# EAGLE board OpenPixelNode (EAGLE 6.5.0)
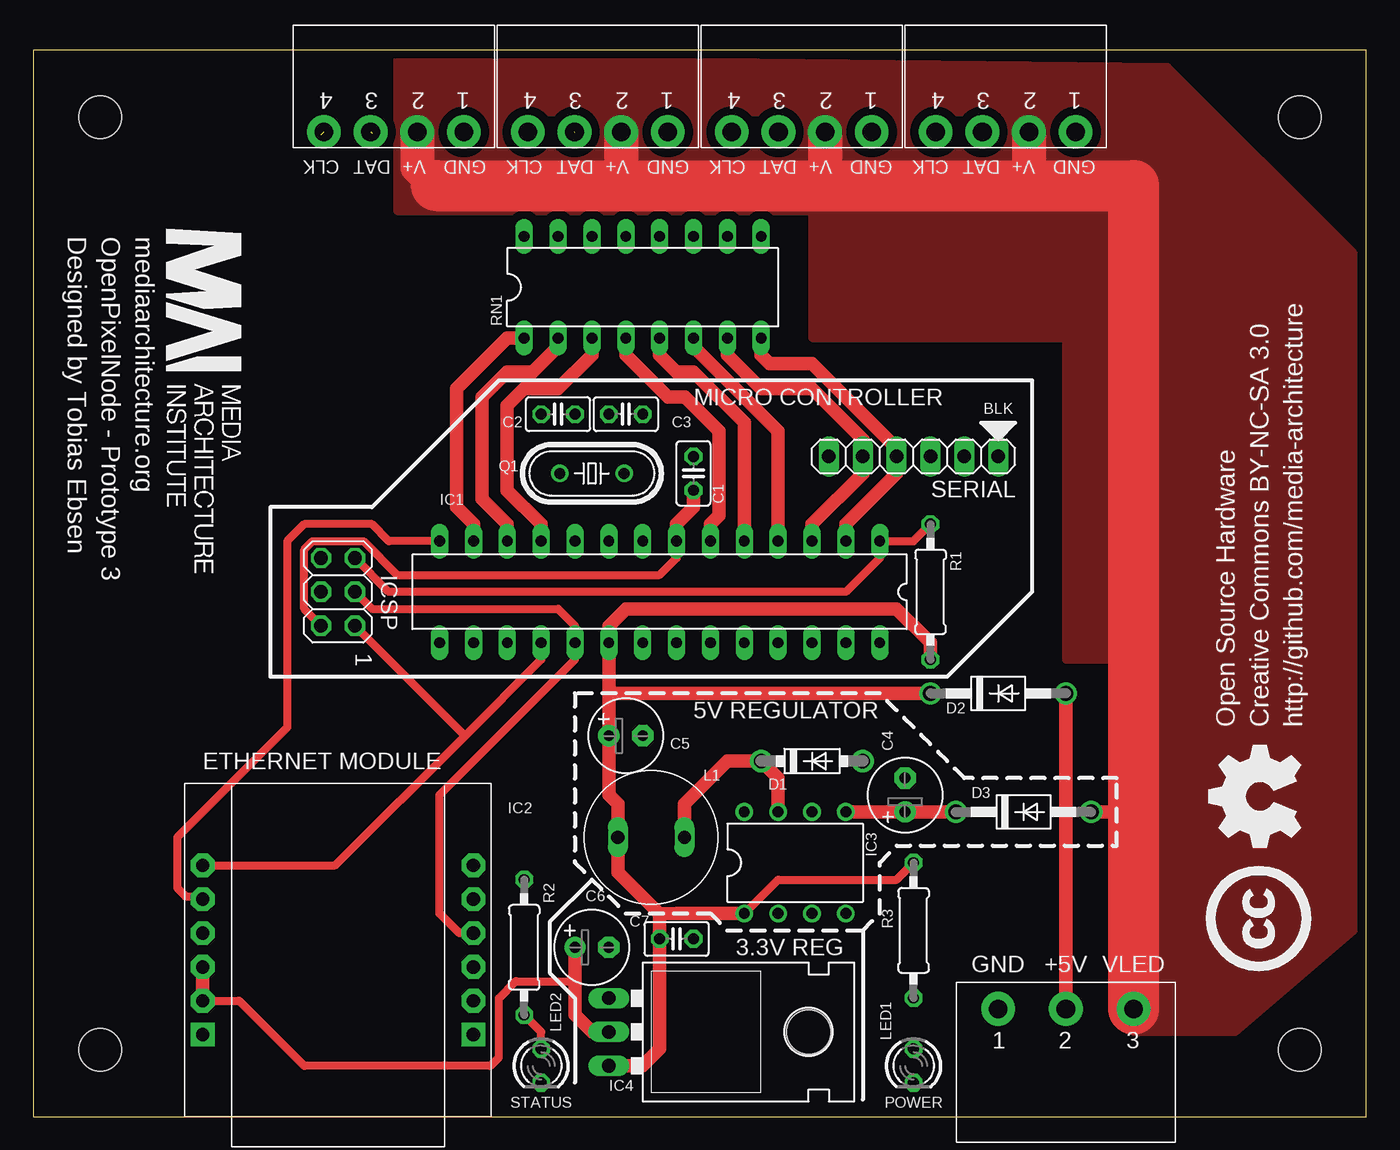
[diagram p0: board, top side]
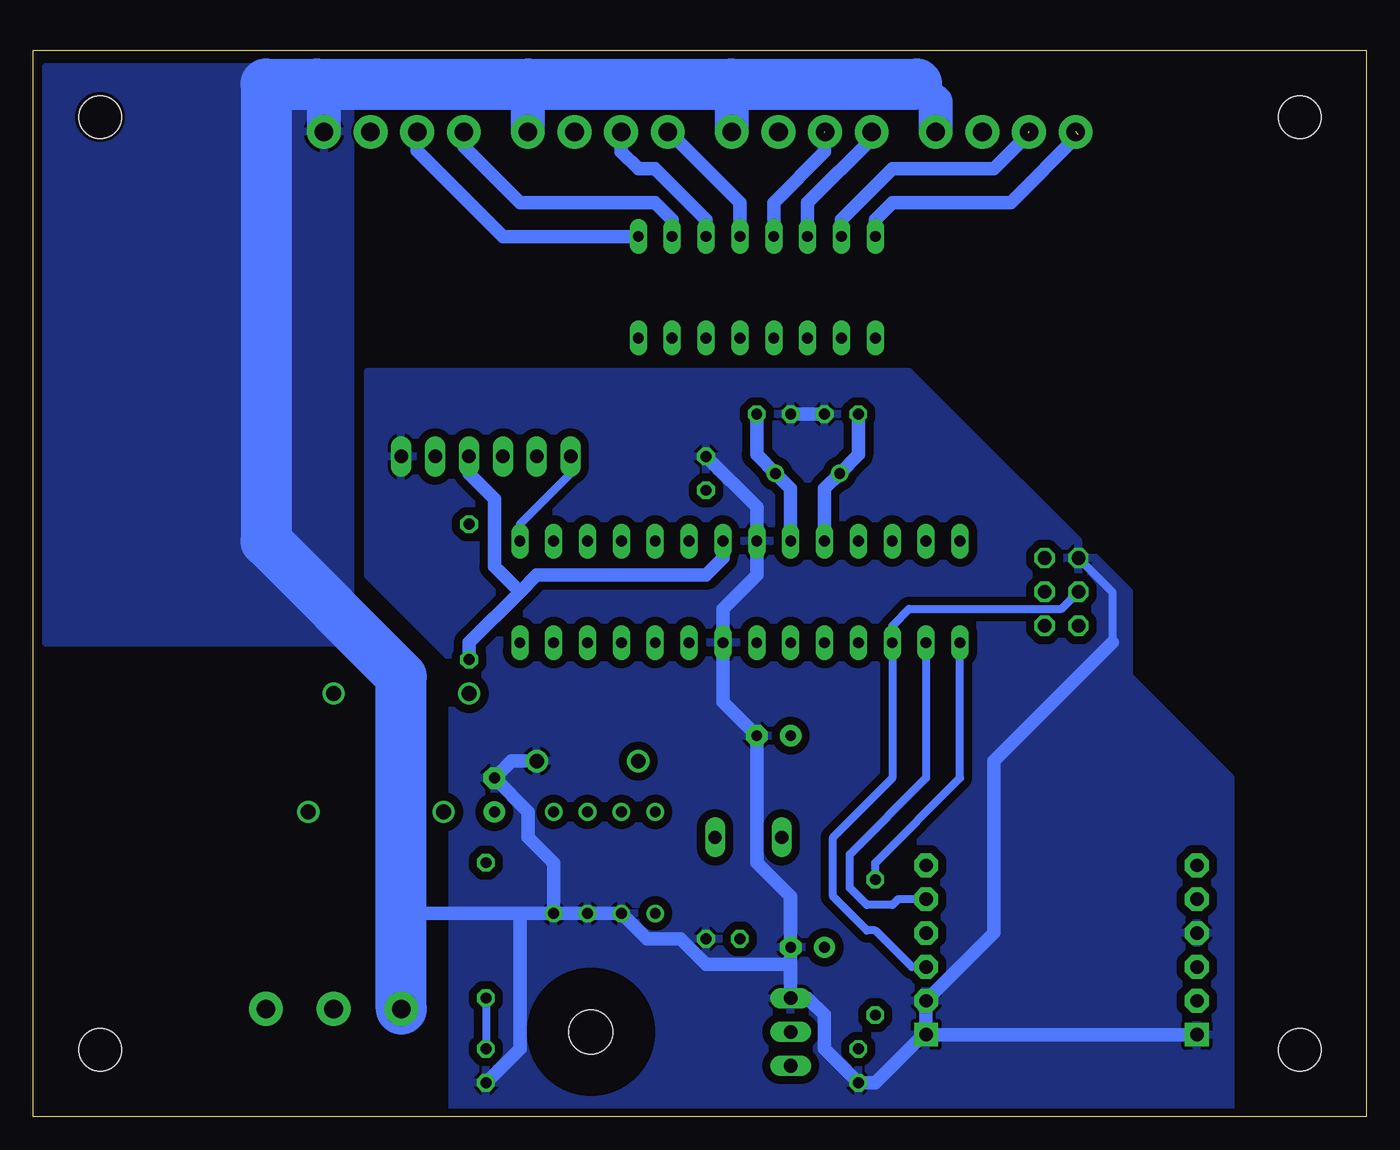
[diagram p1: board, bottom side, seen from below]

Size 100 x 80 mm. Coordinates in mm from the lower left corner, seen from the top.
Outline: 0,0 100,0 100,80 0,80 0,0
Copper layers (1*16): Top 0.035mm / dielectric 1.5mm / Bottom 0.035mm
Design rules "Elecrow_2-layer_eagle_rule": minimum track width 6mil, minimum drill 12mil, track to track 6mil, track to pad 6mil, pad to pad 6mil, via to via 6mil, smd to smd 0mil, copper to edge 10mil, drill to drill 10mil, minimum pad ring 10mil, minimum via ring 6mil, stop-mask expansion 2mil, vias tented up to drill 100mil, thermal gap 10mil
Holes 3.2 mm at 5,5 5,75 95,5 95,75

## Footprints (pad centres in the part's own frame; a part is rotated, then mirrored left to right if it is on the bottom)
C025-025X050 = drill 0.813 octagon: 1 -1.27,0; 2 1.27,0
E2,5-6 = drill 0.813 pad 1.6: + -1.27,0 | drill 0.813 pad 1.6 octagon: - 1.27,0
DO41-7.6 = drill 1.1 pad 1.7: A 3.81,0; C -3.81,0
DO41-10 = drill 1.118: A 5.08,0; C -5.08,0
DIL28-3 = drill 0.813 long: 1 -16.51,-3.81; 2 -13.97,-3.81; 3 -11.43,-3.81; 4 -8.89,-3.81; 5 -6.35,-3.81; 6 -3.81,-3.81; 7 -1.27,-3.81; 8 1.27,-3.81; 9 3.81,-3.81; 10 6.35,-3.81; 11 8.89,-3.81; 12 11.43,-3.81; 13 13.97,-3.81; 14 16.51,-3.81; 15 16.51,3.81; 16 13.97,3.81; 17 11.43,3.81; 18 8.89,3.81; 19 6.35,3.81; 20 3.81,3.81; 21 1.27,3.81; 22 -1.27,3.81; 23 -3.81,3.81; 24 -6.35,3.81; 25 -8.89,3.81; 26 -11.43,3.81; 27 -13.97,3.81; 28 -16.51,3.81
WIZ820IO = drill 1 pad 1.778 square: J1.1 -10.16,6.35; J2.1 10.16,6.35 | drill 1 pad 1.778 octagon: J1.2 -10.16,3.81; J1.3 -10.16,1.27; J1.4 -10.16,-1.27; J1.5 -10.16,-3.81; J1.6 -10.16,-6.35; J2.2 10.16,3.81; J2.3 10.16,1.27; J2.4 10.16,-1.27; J2.5 10.16,-3.81; J2.6 10.16,-6.35
DIL08 = drill 0.813 pad 1.27: 1 -3.81,-3.81; 2 -1.27,-3.81; 3 1.27,-3.81; 4 3.81,-3.81; 5 3.81,3.81; 6 1.27,3.81; 7 -1.27,3.81; 8 -3.81,3.81
TO220L1 = drill 1.016 long: 1 -2.54,-3.81; 2 0,-3.81; 3 2.54,-3.81 | hole 3.302: 0,11.176
2X03 = drill 1.016 octagon: 1 -2.54,-1.27; 2 -2.54,1.27; 3 0,-1.27; 4 0,1.27; 5 2.54,-1.27; 6 2.54,1.27
13R334C = drill 1 long: P$1 0,2.5; P$2 0,-2.5
LED3MM = drill 0.813 octagon: A -1.27,0; K 1.27,0
HC49/S = drill 0.813: 1 -2.413,0; 2 2.413,0
0207/10 = drill 0.813 octagon: 1 -5.08,0; 2 5.08,0
DIL16 = drill 0.813 long: 1 -8.89,-3.81; 2 -6.35,-3.81; 3 -3.81,-3.81; 4 -1.27,-3.81; 5 1.27,-3.81; 6 3.81,-3.81; 7 6.35,-3.81; 8 8.89,-3.81; 9 8.89,3.81; 10 6.35,3.81; 11 3.81,3.81; 12 1.27,3.81; 13 -1.27,3.81; 14 -3.81,3.81; 15 -6.35,3.81; 16 -8.89,3.81
1X06 = drill 1.016 long: 1 -6.35,0; 2 -3.81,0; 3 -1.27,0; 4 1.27,0; 5 3.81,0; 6 6.35,0
691322110004 = drill 1.4 pad 2.54: 1 5.25,-4; 2 1.75,-4; 3 -1.75,-4; 4 -5.25,-4
CTB9358/3 = drill 1.4 pad 2.54: 1 5.08,-3.73; 2 0,-3.73; 3 -5.08,-3.73

## Placement (x,y rotation side)
C1  100nF  [C025-025X050]  49.53,48.26 90 top
C2  22pF  [C025-025X050]  39.37,52.7 180 top
C3  22pF  [C025-025X050]  44.45,52.7 0 top
C4  22uF  [E2,5-6]  65.41,24.13 90 top
C5  220uF  [E2,5-6]  44.45,28.57 0 top
C6  10uF  [E2,5-6]  41.91,12.7 0 top
C7  100nF  [C025-025X050]  48.26,13.34 0 top
D1  1N5819-T  [DO41-7.6]  58.42,26.67 0 top
D2  1N4004  [DO41-10]  72.39,31.75 0 top
D3  1N4004  [DO41-10]  74.3,22.86 0 top
IC1  MEGA8-P  [DIL28-3]  46.99,39.37 180 top
IC2  wiz820io  [WIZ820IO]  22.86,12.5 180 top
IC3  LM2574N-5.0  [DIL08]  57.15,19.05 0 top
IC4  LD117AV33  [TO220L1]  46.99,6.35 270 top
ICSP  [2X03]  22.86,39.37 90 top
L1  330uH  [13R334C]  46.35,20.95 270 top
LED1  [LED3MM]  66.04,3.81 270 top
LED2  [LED3MM]  38.1,3.81 270 top
Q1  20MHz  [HC49/S]  41.91,48.26 0 top
R1  10k  [0207/10]  67.31,39.37 270 top
R2  220R  [0207/10]  36.83,12.7 90 top
R3  220R  [0207/10]  66.04,13.97 270 top
RN1  [DIL16]  45.72,62.23 0 top
SERIAL  [1X06]  66.04,49.53 180 top
U$1  691322110004  [691322110004]  72.95,77.88 0 top
U$2  691322110004  [691322110004]  57.65,77.88 0 top
U$3  691322110004  [691322110004]  42.35,77.88 0 top
U$4  691322110004  [691322110004]  27.05,77.88 0 top
U$5  CTB9358/3  [CTB9358/3]  77.47,4.35 180 top

## Library data of the parts
C1-C7 R1-R3 = rcl
D1-D3 = diode
IC1 = atmel; OC_FARNELL: unknown; OC_NEWARK: unknown
IC2 = Wiz820io
IC3 = linear
IC4 = v-reg
ICSP SERIAL = pinhead
L1 = inductors
LED1 LED2 = led
Q1 = crystal; OC_FARNELL: 1667008; OC_NEWARK: unknown
RN1 = resistor-dil; OC_FARNELL: unknown; OC_NEWARK: unknown
U$1-U$5 = con-wurth

## Nets
+3V3: C6.+ IC2.J2.2 IC2.J2.3 IC4.2
+5V: C1.1 C5.+ C7.1 D2.C IC1.7 IC1.20 IC3.1 IC4.3 ICSP.2 L1.P$2 R1.2 R3.1 SERIAL.3
D0: IC1.2 RN1.8 SERIAL.4
D1: IC1.3 RN1.7 SERIAL.5
D2: IC1.4 RN1.6
D3: IC1.5 RN1.5
D4: IC1.6 RN1.4
D5: IC1.11 RN1.3
D6: IC1.12 RN1.2
D7: IC1.13 RN1.1
GND: C1.2 C2.1 C3.1 C4.- C5.- C6.- C7.2 D1.A IC1.8 IC1.22 IC2.J1.1 IC2.J1.2 IC2.J2.1 IC2.J2.4 IC3.2 IC3.3 IC3.4 IC4.1 ICSP.6 LED1.K LED2.K SERIAL.1 U$1.1 U$2.1 U$3.1 U$4.1 U$5.1
N$1: LED1.A R3.2
N$2: C3.2 IC1.9 Q1.2
N$3: C2.2 IC1.10 Q1.1
N$4: IC1.16 IC2.J1.5
N$5: IC1.18 IC2.J2.6 ICSP.1
N$6: D2.A U$5.2
N$7: IC1.17 IC2.J1.3 ICSP.4
N$8: LED2.A R2.1
N$9: C4.+ D3.C IC3.5
N$10: D1.C IC3.7 L1.P$1
N$13: RN1.11 U$2.3
N$14: RN1.12 U$2.4
N$15: RN1.13 U$3.3
N$16: RN1.14 U$3.4
N$17: RN1.15 U$4.3
N$18: RN1.16 U$4.4
N$19: RN1.10 U$1.4
N$20: RN1.9 U$1.3
N$21: IC1.14 IC2.J2.5
N$22: IC1.15 R2.2
RESET: IC1.1 ICSP.5 R1.1 SERIAL.6
SCK: IC1.19 IC2.J1.4 ICSP.3
VCC: D3.A U$1.2 U$2.2 U$3.2 U$4.2 U$5.3

## Tracks (layer width: path | path; a pad name or v marks a point on that pad's centre or on a via)
+3V3
  Top 0.61: IC2.J2.2 15.44,8.69 20.32,3.81 34.29,3.81 34.92,4.45 34.92,8.89 36.2,10.16 40.64,10.16
  Top 1.016: IC2.J2.2 IC2.J2.3 | C6.+ 40.64,10.16 40.64,7.62 41.91,6.35 IC4.2
+5V
  Top 0.61: IC1.20 43.18,36.83 | IC3.1 55.88,17.78 64.77,17.78 R3.1 | ICSP.2 20.32,38.1 20.32,42.55 20.95,43.18 24.77,43.18 27.3,40.64 46.99,40.64 48.26,41.91 IC1.7
  Top 1.016: IC1.7 48.26,44.45 49.53,45.72 C1.1 | 43.18,36.83 44.45,38.1 64.77,38.1 67.31,35.56 R1.2 | IC4.3 45.72,3.81 46.99,5.08 C7.1 46.99,15.2 | IC1.20 43.18,31.75 | 43.18,31.75 C5.+ 43.18,24.13 43.85,23.45 L1.P$2 43.85,18.34 46.99,15.2 | IC3.1 48.3,15.24 46.99,15.2 | D2.C 43.18,31.75
  Bottom 1.016: IC1.7 48.26,41.91 49.53,40.64 62.23,40.64 63.5,39.37 | SERIAL.3 67.31,48.26 65.41,46.35 65.41,41.27 63.5,39.37 | 63.5,39.37 67.31,35.56 R1.2
D0
  Top 1.016: IC1.2 60.96,44.45 64.77,48.26 SERIAL.4 64.77,50.16 58.42,56.52 55.24,56.52 54.61,57.15 RN1.8
D1
  Top 1.016: IC1.3 58.42,44.45 62.23,48.26 SERIAL.5 62.23,50.8 58.42,54.61 54.61,54.61 52.07,57.15 RN1.7
D2
  Top 1.016: RN1.6 49.53,57.78 55.88,51.44 IC1.4
D3
  Top 1.016: RN1.5 46.99,57.15 48.26,55.88 49.53,55.88 53.34,52.07 IC1.5
D4
  Top 1.016: IC1.6 50.8,44.45 51.44,45.09 51.44,51.44 48.9,53.98 47.62,53.98 44.45,57.15 RN1.4
D5
  Top 1.016: IC1.11 38.1,44.45 35.56,46.99 35.56,53.34 36.83,54.61 39.37,54.61 41.91,57.15 RN1.3
D6
  Top 1.016: IC1.12 35.56,44.45 33.66,46.35 33.66,53.98 35.56,55.88 37.47,55.88 39.37,57.78 RN1.2
D7
  Top 1.016: IC1.13 33.02,44.45 31.75,45.72 31.75,54.61 35.56,58.42 RN1.1
GND
  Bottom 0.61: ICSP.6 19.05,39.37 19.05,35.56
  Bottom 1.016: IC2.J2.1 IC2.J1.1 | IC2.J1.1 IC2.J1.2 27.94,13.77 27.94,26.67 19.05,35.56 | C2.1 C3.1 | C1.2 45.72,45.72 IC1.8 45.72,40.64 48.26,38.1 IC1.22 48.26,31.11 C5.- 45.72,19.05 43.18,16.51 C6.- 43.18,11.43 | 72.39,15.24 63.5,15.24 | 63.5,15.24 IC3.4 | IC3.4 IC3.3 IC3.2 53.98,13.34 51.44,13.34 49.53,11.43 43.18,11.43 | IC3.4 60.96,19.05 62.87,20.95 62.87,22.86 C4.- 64.14,26.67 D1.A | IC2.J1.1 33.22,6.15 36.83,2.54 LED2.K 40.64,5.08 40.64,7.62 41.91,8.89 IC4.1 43.18,11.43 | LED1.K 63.5,5.08 63.5,15.24
  Bottom 2.54: U$1.1 78.2,76.93 78.74,77.47 | U$2.1 62.9,77.44 62.87,77.47 | U$3.1 47.6,77.44 47.62,77.47 | U$4.1 32.3,76.11 32.38,76.2 32.45,76.2 33.72,77.47
  Bottom 3.81: U$5.1 72.39,15.24 72.39,33.02 82.55,43.18 82.55,77.47 78.74,77.47 62.87,77.47 47.62,77.47 33.72,77.47
  pour Bottom (isolate 0.61): 10.16,0 10.16,25.4 17.78,33.02 17.78,39.37 34.29,55.88 74.93,55.88 74.93,40.64 68.58,34.29 68.58,0
  pour Bottom: 76.2,36.83 76.2,78.74 99.06,78.74 99.06,35.56 76.2,35.56
N$1
  Bottom 0.61: R3.2 LED1.A
N$2
  Bottom 1.016: IC1.9 43.18,47.12 Q1.2 45.72,49.66 C3.2
N$3
  Bottom 1.016: IC1.10 40.64,47.12 Q1.1 38.1,49.66 C2.2
N$4
  Bottom 0.61: IC1.16 33.02,25.4 38.73,19.68 38.73,17.14 37.47,15.88 35.56,15.88 35.12,16.31 IC2.J1.5
N$5
  Top 0.61: IC2.J2.6 22.66,18.85 32.38,28.57 | IC1.18 38.1,34.29 32.38,28.57 | ICSP.1 32.38,28.57
N$6
  Top 1.016: U$5.2 D2.A
N$7
  Bottom 0.61: IC2.J1.3 34.09,11.23 36.83,13.97 37.47,13.97 40.01,16.51 40.01,20.95 35.56,25.4 IC1.17 35.56,36.83 34.29,38.1 22.86,38.1 ICSP.4
N$8
  Top 0.61: LED2.A 38.1,6.35 R2.1
N$9
  Top 1.016: D3.C IC3.5 C4.+
N$10
  Top 1.016: IC3.7 55.88,25.4 D1.C 52.07,26.67 48.85,23.45 L1.P$1
N$13
  Bottom 1.016: U$2.3 55.9,72.41 54.61,71.12 53.34,71.12 49.53,67.31 RN1.11
N$14
  Bottom 1.016: U$2.4 52.29,73.88 46.99,68.58 RN1.12
N$15  (1 unrouted)
  Bottom 1.016: 40.64,73.84 40.64,72.39 44.45,68.58 RN1.13
N$16
  Bottom 1.016: U$3.4 37.1,73.39 41.91,68.58 RN1.14
N$17  (1 unrouted)
  Bottom 1.016: 25.4,73.78 25.4,73.66 27.94,71.12 35.56,71.12 39.37,67.31 RN1.15
N$18  (1 unrouted)
  Bottom 1.016: 21.59,73.67 21.59,73.66 26.67,68.58 35.56,68.58 36.83,67.31 RN1.16
N$19
  Bottom 1.016: U$1.4 67.7,72.78 63.5,68.58 53.34,68.58 52.07,67.31 RN1.10
N$20
  Bottom 1.016: U$1.3 71.2,72.47 64.77,66.04 RN1.9
N$21
  Top 0.61: IC1.14 26.67,43.18 25.4,44.45 20.32,44.45 19.05,43.18 19.05,29.21 10.79,20.95 10.79,17.14 11.43,16.51 12.5,16.51
  Top 1.016: 12.5,16.51 IC2.J2.5
N$22
  Bottom 0.61: IC1.15 30.48,25.4 36.83,19.05 R2.2
RESET
  Top 0.61: ICSP.5 26.67,39.37 60.96,39.37 63.5,41.91 IC1.1 66.04,43.18 R1.1
  Bottom 0.61: SERIAL.6 59.69,48.26 63.5,44.45 IC1.1
SCK
  Top 0.61: IC2.J1.4 31.95,13.77 30.48,15.24 30.48,24.13 40.64,34.29 IC1.19 40.64,36.83 39.37,38.1 25.4,38.1 ICSP.3
VCC
  Top 1.016: D3.A 82.55,22.86
  Top 2.54: U$1.2 74.7,70.08 74.93,69.85 | U$2.2 59.4,70.14 59.69,69.85 | U$3.2 44.1,70.2 44.45,69.85 | U$4.2 28.8,71.27 30.22,69.85
  Top 3.81: U$5.3 82.55,22.86 82.55,69.85 74.93,69.85 59.69,69.85 44.45,69.85 30.22,69.85
  pour Top (isolate 0.61, no thermals): 58.42,67.94 58.42,58.42 77.47,58.42 77.47,34.29 82.55,34.29 82.55,6.35 90.17,6.35 99.06,13.97 99.06,64.77 85.09,78.74 27.3,79.38 27.3,67.94

## Text on the board
tPlace: Open Source Hardware | Creative Commons BY-NC-SA 3.0 | http://github.com/media-architecture | 3.3V REG
tNames: CLK | DAT | V+ | GND | CLK | DAT | V+ | GND | CLK | DAT | V+ | GND | CLK | DAT | V+ | GND | Designed by Tobias Ebsen | OpenPixelNode - Prototype 3 | mediaarchitecture.org | MICRO CONTROLLER | BLK | 1 | 5V REGULATOR | ETHERNET MODULE | GND | +5V | VLED | STATUS | POWER